# EAGLE board wifiweatherguy (EAGLE 7.5.0)
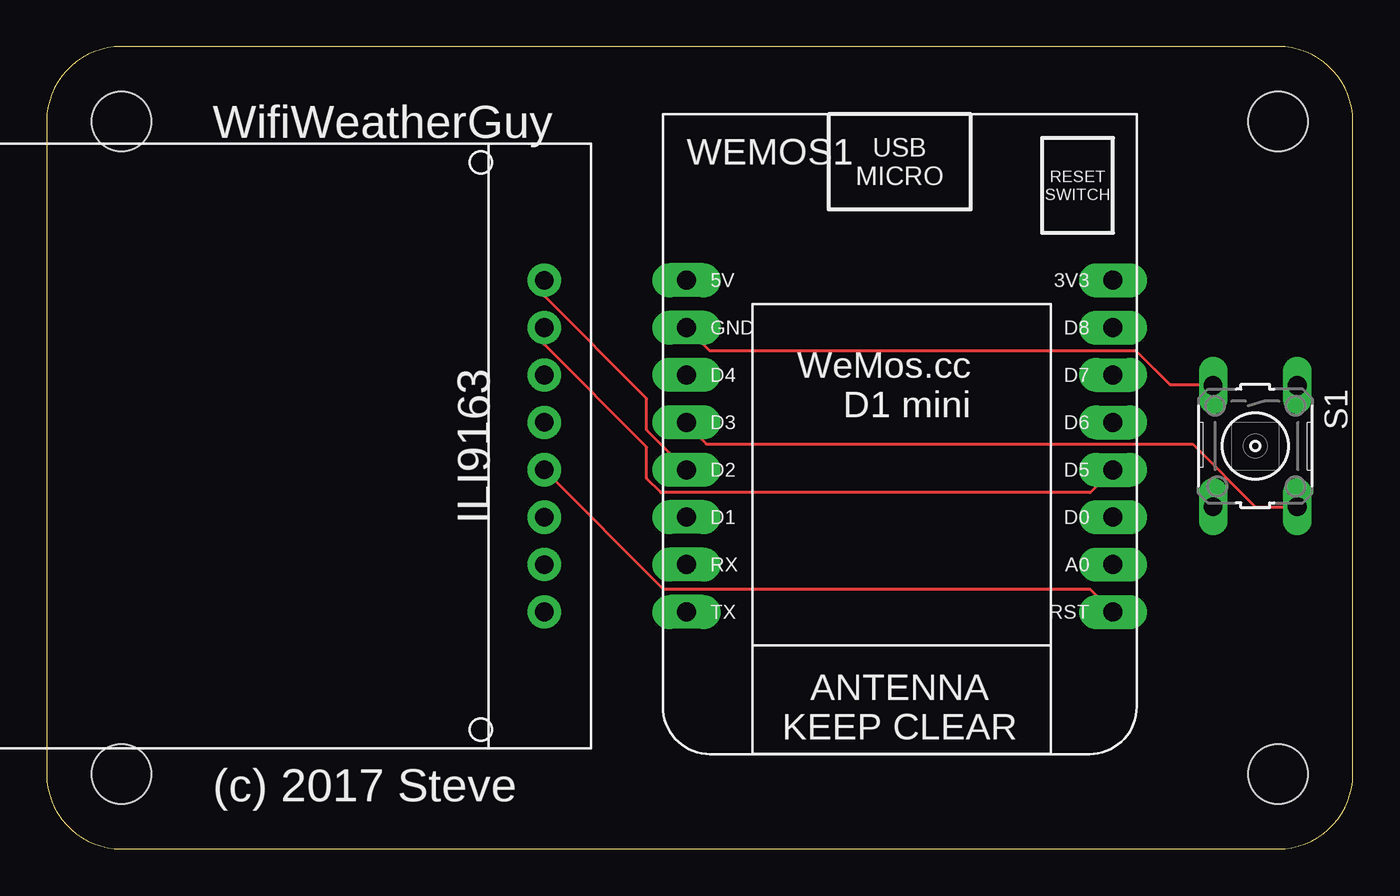
[diagram p0: board, top side]
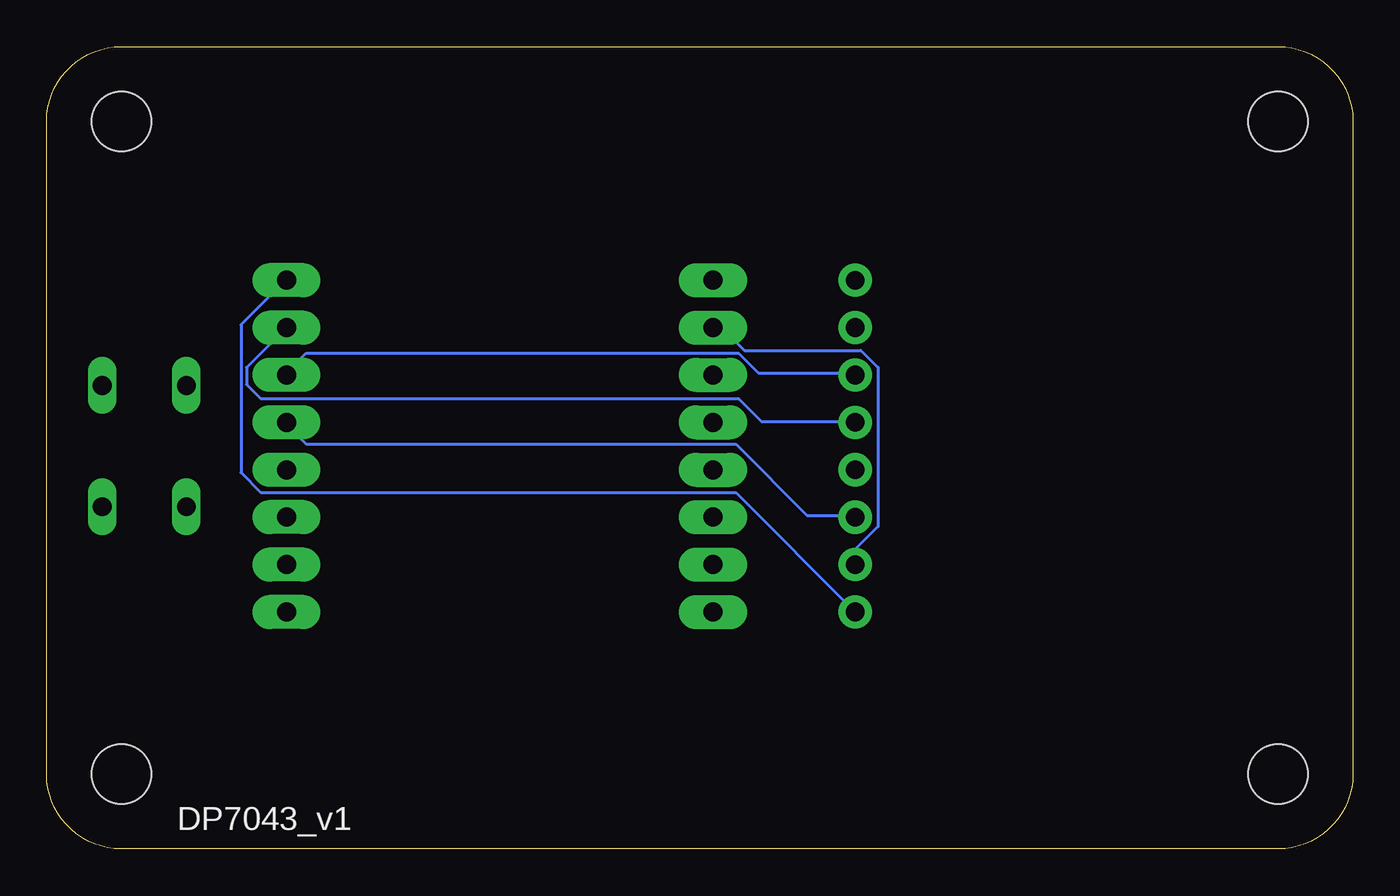
[diagram p1: board, bottom side, seen from below]

Size 70 x 43 mm. Coordinates in mm from the lower left corner, seen from the top.
Copper layers (1*16): Top 0.035mm / dielectric 1.5mm / Bottom 0.035mm
Design rules "SeeedStudio_2layer_DRU_no_angle_20140221": minimum track width 6mil, minimum drill 12mil, track to track 6mil, track to pad 6mil, pad to pad 6mil, via to via 6mil, smd to smd 0mil, copper to edge 10mil, drill to drill 10mil, minimum pad ring 10mil, minimum via ring 6mil, stop-mask expansion 2mil, vias tented up to drill 100mil, thermal gap 10mil

## Footprints (pad centres in the part's own frame; a part is rotated, then mirrored left to right if it is on the bottom)
B3F-10XX = drill 1.016 long: 1 -3.251,2.261; 2 3.251,2.261; 3 -3.251,-2.261; 4 3.251,-2.261
1.44-TFT-V1.1 = drill 1 pad 1.778: A0 0,7.62; CS 0,12.7; GND 0,15.24; LED 0,0; RESET 0,10.16; SCK 0,2.54; SDA 0,5.08; VCC 0,17.78
DP7043_V1 = hole 3.2: 4,4; 66,4; 66,39; 4,39
WEMOS-D1-MINI = drill 1.016 pad 1.829 long: 3V3 -10.16,-10.16; 5V 12.7,-10.16; A0 -10.16,5.08; D0 -10.16,2.54; D1 12.7,2.54; D2 12.7,0; D3 12.7,-2.54; D4 12.7,-5.08; D5 -10.16,0; D6 -10.16,-2.54; D7 -10.16,-5.08; D8 -10.16,-7.62; GND 12.7,-7.62; RESET -10.16,7.62; RX 12.7,5.08; TX 12.7,7.62

## Placement (x,y rotation side)
S1  Display  [B3F-10XX]  64.77,21.59 270 top
U$1  1.44"-TFT-V1.1  [1.44-TFT-V1.1]  26.67,30.48 180 top
U$2  [DP7043_V1]  0,0 0 top
WEMOS1  mini d1  [WEMOS-D1-MINI]  46.99,20.32 180 top

## Library data of the parts
S1 = switch-omron; MPN: B3F-1000; OC_FARNELL: 176432; OC_NEWARK: 36M3542
U$1 = tft_1.8_1.44_oled_0.96
U$2 = dp_pcb
WEMOS1 = esp8266modules

## Nets
N$1: U$1.VCC WEMOS1.3V3
N$2: U$1.CS WEMOS1.D6
N$3: U$1.A0 WEMOS1.D8
N$4: U$1.SDA WEMOS1.D7
N$5: U$1.SCK WEMOS1.D5
N$6: U$1.LED WEMOS1.D2
N$7: S1.3 U$1.GND WEMOS1.GND
N$8: U$1.RESET WEMOS1.RESET
N$9: S1.2 WEMOS1.D3

## Tracks (layer width: path | path; a pad name or v marks a point on that pad's centre or on a via)
N$1
  Bottom 0.152: U$1.VCC 33.07,19.1 58.52,19.1 59.59,20.17 59.59,28.09 57.15,30.53 WEMOS1.3V3
N$2
  Bottom 0.152: U$1.CS 26.67,17.88 29.26,17.88 33.07,21.69 56.08,21.69 57.15,22.76 WEMOS1.D6
N$3
  Bottom 0.152: WEMOS1.D8 59.28,25.81 59.28,24.89 58.52,24.13 32.92,24.13 31.7,22.91 26.67,22.91 U$1.A0
N$4
  Bottom 0.152: U$1.SDA 26.67,25.5 31.85,25.5 32.92,26.57 56.08,26.57 57.15,25.5 WEMOS1.D7
N$5
  Top 0.152: U$1.SCK 26.67,27.03 32.16,21.54 32.16,19.86 32.92,19.1 55.93,19.1 WEMOS1.D5
N$6
  Top 0.152: U$1.LED 26.67,29.62 32.16,24.13 32.16,22.45 WEMOS1.D2
N$7
  Top 0.152: WEMOS1.GND 35.51,26.72 58.37,26.72 60.2,24.89 62.48,24.89 S1.3
  Bottom 0.152: U$1.GND 26.67,16.05 25.45,17.27 25.45,25.81 26.36,26.72 32.61,26.72 33.83,27.94 WEMOS1.GND
N$8
  Top 0.152: U$1.RESET 33.07,13.92 55.93,13.92 WEMOS1.RESET
N$9
  Top 0.152: S1.2 64.77,18.34 61.42,21.69 35.36,21.69 34.29,22.76 WEMOS1.D3

## Text on the board
tPlace: WifiWeatherGuy | ILI9163 | (c) 2017 Steve